# Altium PCB TriF3FCPDB.PcbDoc (part 1 of 2)
Units mm, origin at the board's own origin, x right, y up, seen from the top; angles counter-clockwise.
Board outline 130.11 x 100.1 mm, 2 copper layers (Top Layer, Bottom Layer); 86 components, 62 nets, 310 pads, 526 vias.
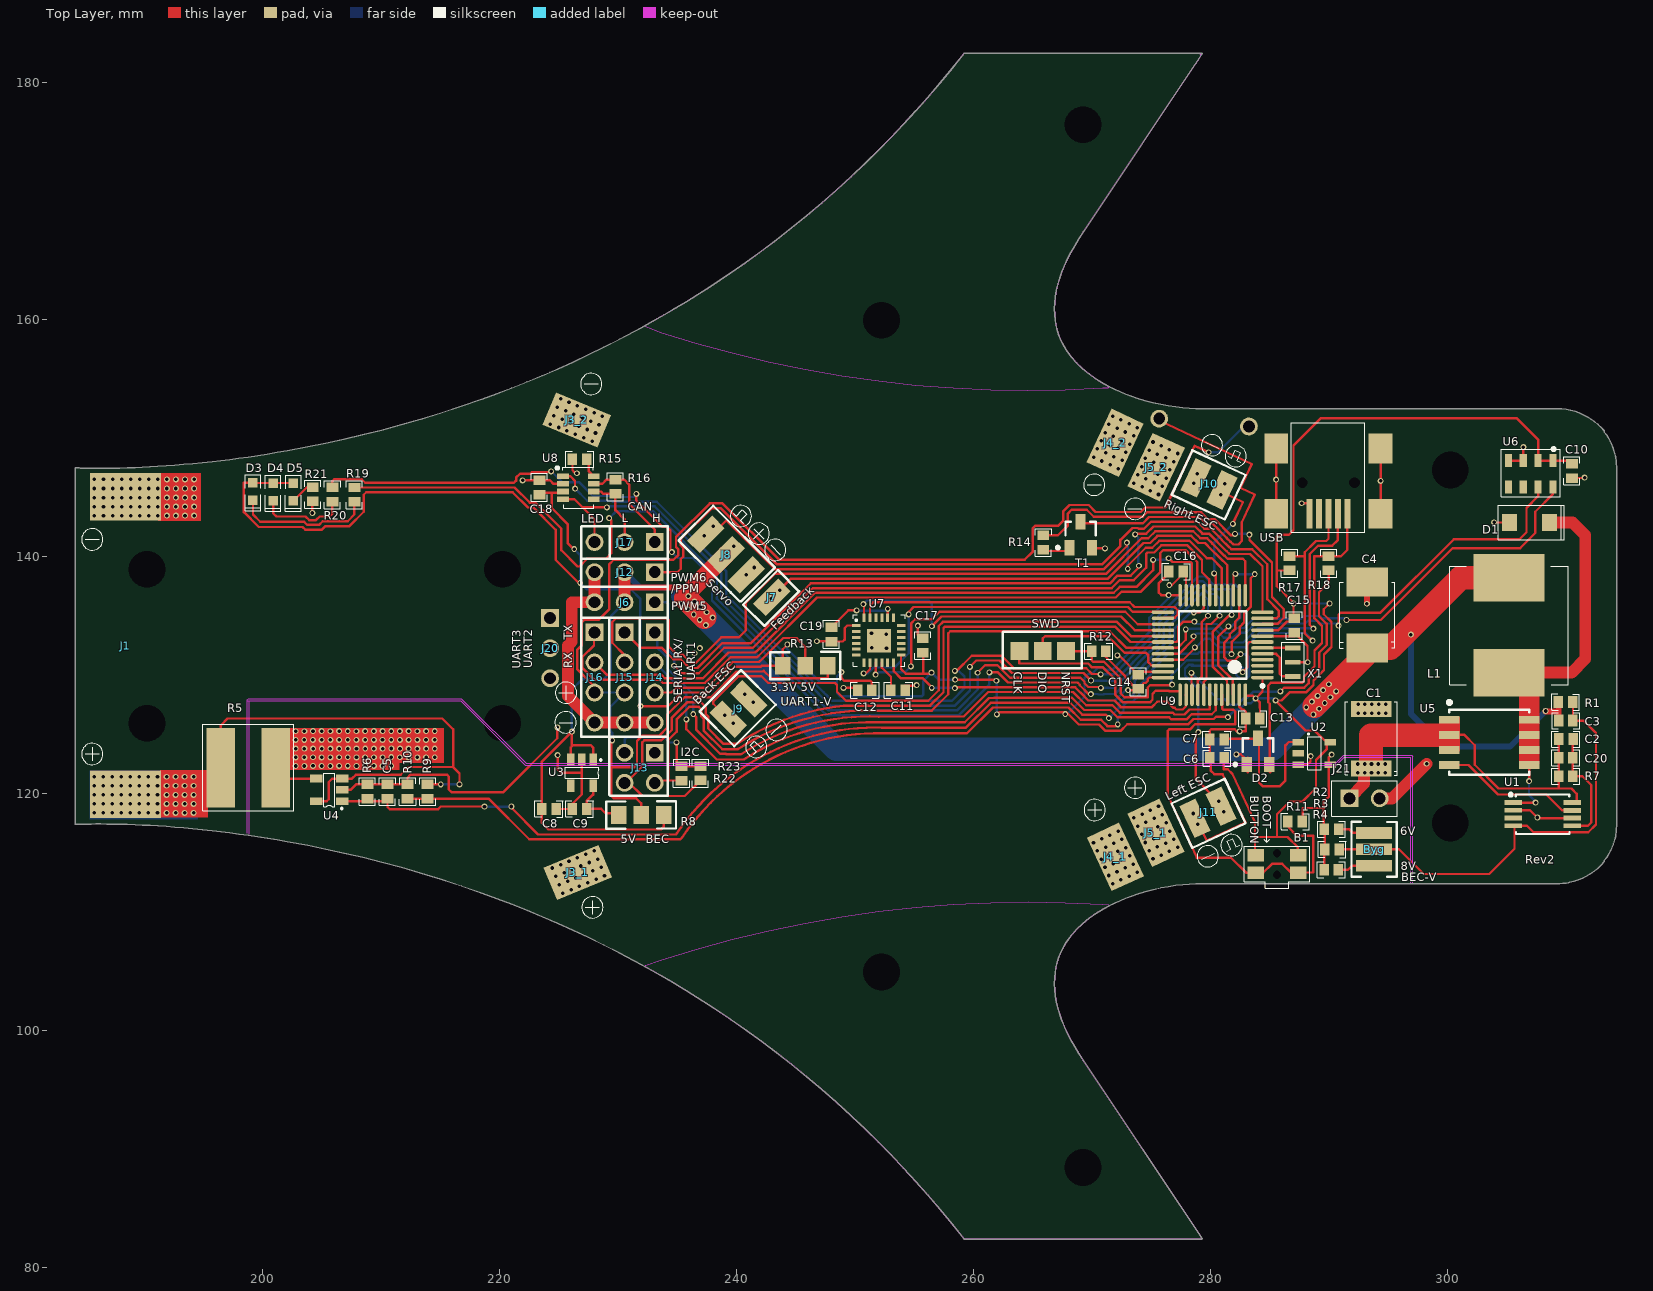
[diagram p0: Top Layer view]
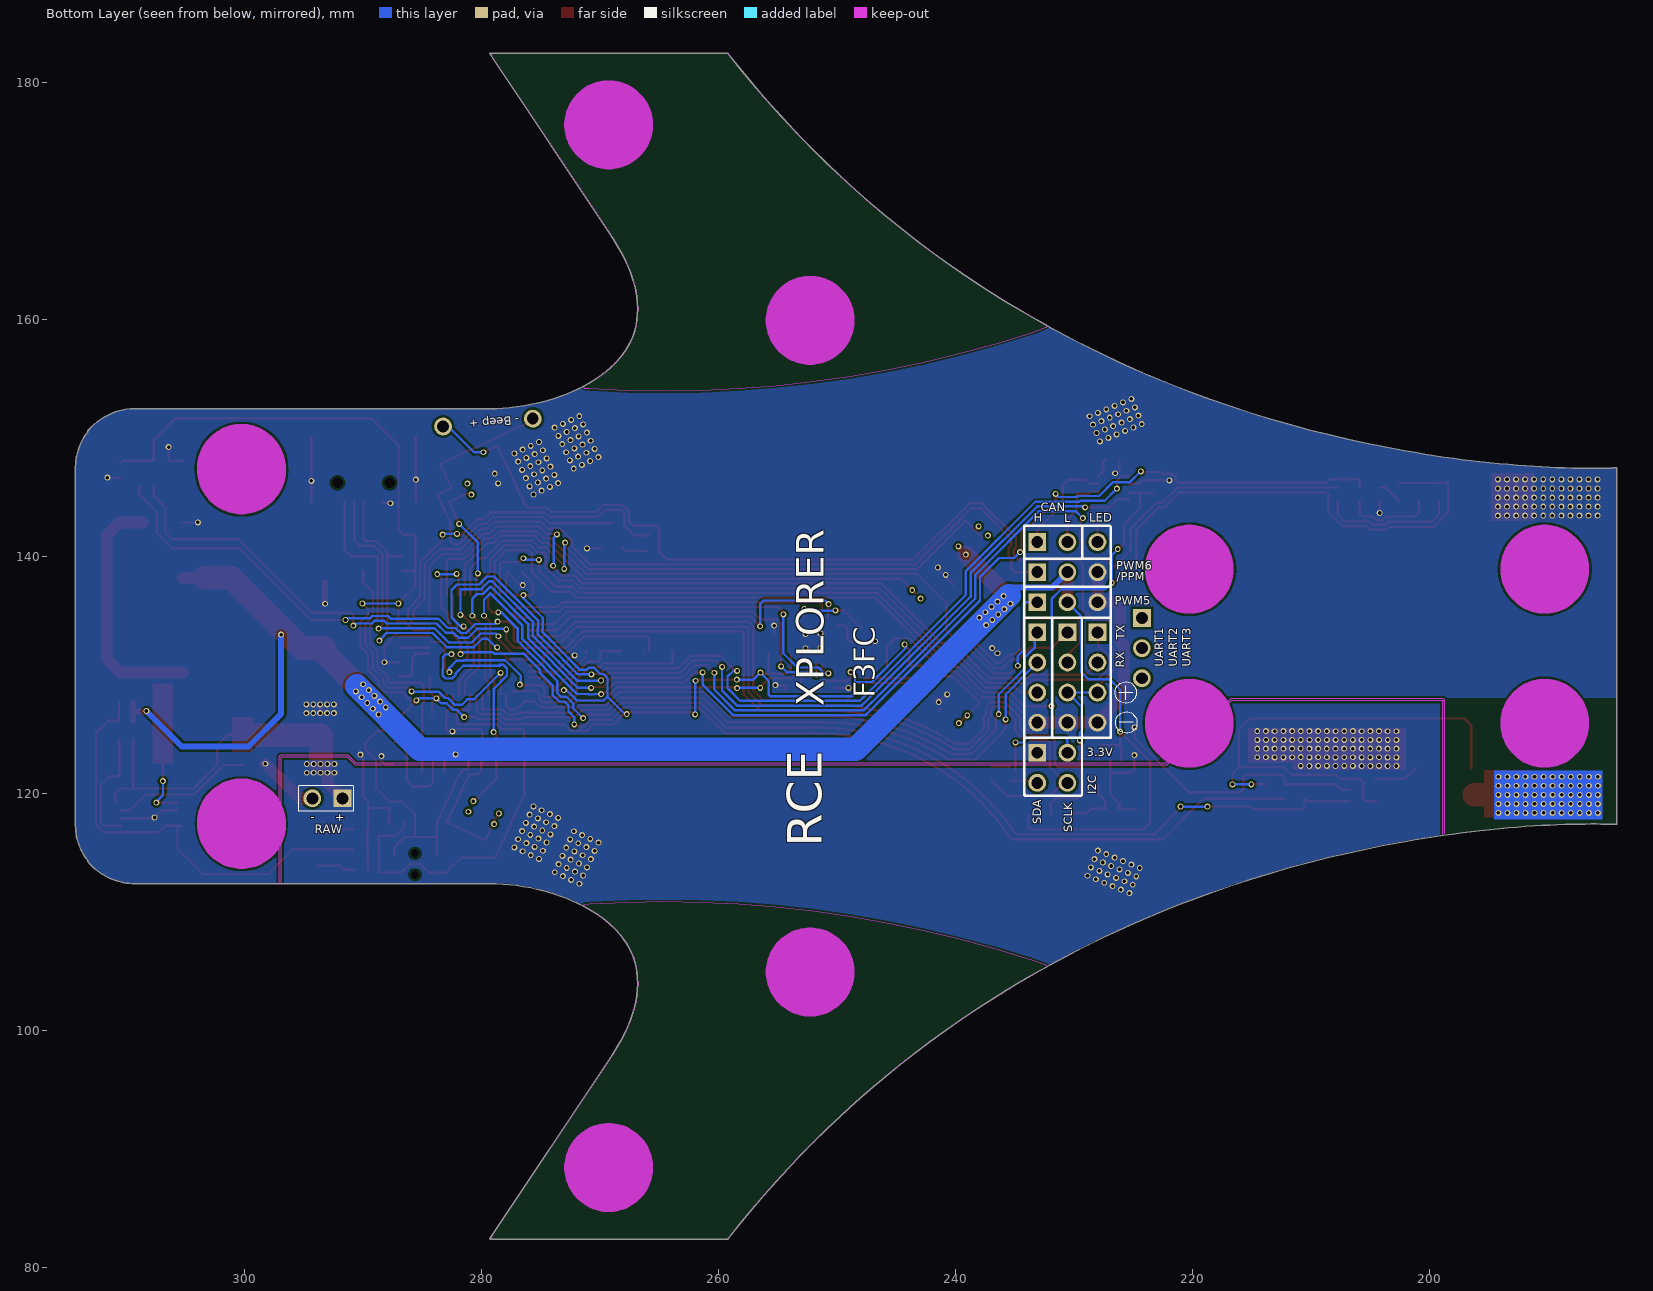
[diagram p1: Bottom Layer view, seen from below]

## Layer stack, top to bottom
Top Layer: signal copper 0.0356
Dielectric: dielectric 0.32, FR-4, Dk 4.8
Bottom Layer: signal copper 0.0356

## Board outline
805 vertices, not listed, extent 184.187,82.388 314.298,182.488

## Design rules (kind name [scope] priority, off if disabled: settings)
Clearance [All] p1: gap=0.2
ComponentClearance [All] p1: gap=0.1 collisioncheckmode=3 verticalgap=0.1 showdistances=FALSE
HoleSize [All] p1: absolutevalues=TRUE maxlimit=6 minlimit=0.025 maxpercent=80.000 minpercent=20.000
MinimumSolderMaskSliver [InNet('VBAT+') vs InNet('VBAT+')] p1: minsoldermaskwidth=0.1
PolygonConnect PolygonConnect_2 [InNet('GND') vs InNet('GND')] p1: connectstyle=Direct reliefconductorwidth=0.254 reliefentries=4 polygonreliefangle="90 Angle" airgapwidth=0.254
PolygonConnect PolygonConnect_1 [InNet('VIN') vs InNet('VIN')] p2: connectstyle=Direct reliefconductorwidth=0.254 reliefentries=4 polygonreliefangle="90 Angle" airgapwidth=0.254
PolygonConnect [All] p3: connectstyle=Relief reliefconductorwidth=0.254 reliefentries=4 polygonreliefangle="90 Angle" airgapwidth=0.254
RoutingVias [All] p1: holewidth=0.3 width=0.5 viastyle="Through Hole" minholewidth=0.3 minwidth=0.5 maxholewidth=55 maxwidth=66
SilkToSilkClearance [All] p1: silktosilkclearance=0.1
SilkToSolderMaskClearance [IsPad] p1: minsilkscreentomaskgap=0.1 clearancetoexposedcopper=TRUE
SolderMaskExpansion [All] p1: expansion=0.102
Width [All] p1: maxlimit=50 minlimit=0.2 preferedwidth=0.2
23 further rules are at their usual default settings.

## Components (designator, comment, footprint, x,y, rotation, side; value= is the part's Value field where it differs from the comment)
"- Beep +" "Buzzer_BP1360-7.6" "Buzzer_BP1360-7.6 - NoRing" 283.248,150.979 r85 bottom (schematic designator Beep)
B1 "Tryckknapp_EVQP7C" Tryckknapp_EVQP7C 283.817,114.778 r0 top
Byg "2POL_LÖDBYGEL" 2pol_lödbygel 293.807,116.678 r270 top
C1 "CAP Tantal" "Cap Tantal 2312" 293.584,122.135 r90 top
C2 "CAP 0603" Cap_0603 310.602,124.592 r180 top
C3 "CAP 0603" Cap_0603 310.596,126.156 r180 top
C4 "CAP Tantal" "Cap Tantal35V" 293.24,132.291 r90 top
C5 "CAP 0603" Cap_0603 210.544,120.773 r270 top
C6 "CAP 0603" Cap_0603 279.955,122.986 r0 top
C7 "CAP 0603" Cap_0603 279.951,124.564 r0 top
C8 "CAP 0603" Cap_0603 224.775,118.698 r180 top
C9 "CAP 0603" Cap_0603 226.155,118.703 r0 top
C10 "CAP 0603" Cap_0603 310.503,146.629 r90 top
C11 "CAP 0603" Cap_0603 254.237,128.714 r180 top
C12 "CAP 0603" Cap_0603 250.232,128.714 r0 top
C13 "CAP 0603" Cap_0603 282.977,126.321 r0 top
C14 "CAP 0603" Cap_0603 273.91,130.032 r270 top
C15 "CAP 0603" Cap_0603 287.079,133.582 r90 top
C16 "CAP 0603" Cap_0603 277.703,138.738 r180 top
C17 "CAP 0603" Cap_0603 255.726,133.098 r270 top
C18 "CAP 0603" Cap_0603 223.365,146.438 r270 top
C19 "CAP 0603" Cap_0603 248.01,134.03 r270 top
C20 "CAP 0603" Cap_0603 310.59,123.028 r180 top
D1 "DIOD_SMD_SX34_Schottky 3A" "SX34 Diode" 308.628,142.875 r180 top
D2 "PMEG3005CT" Sot-23 284.018,123.18 r0 top
D3 "Led_SMD_0603" "Led 0603" 199.195,146.242 r270 top
D4 "Led_SMD_0603" "Led 0603" 200.895,146.208 r270 top
D5 "Led_SMD_0603" "Led 0603" 202.594,146.208 r270 top
J1 "POWERPADS2_21mmPitch" PowerPads6x4.4mm_P29mm 188.427,119.944 r90 top
J3_1 "PowerPad" PowerPad5x3mm#1 226.601,113.341 r292.5 top
J3_2 "PowerPad" PowerPad5x3mm#1 226.524,151.527 r247.5 top
J4_1 "PowerPad" PowerPad5x3mm#2 271.973,114.648 r45 top
J4_2 "PowerPad" PowerPad5x3mm#3 271.955,149.596 r315 top
J5_1 "PowerPad" PowerPad5x3mm#2 275.401,116.695 r45 top
J5_2 "PowerPad" PowerPad5x3mm#3 275.426,147.55 r135 top
J6 "Servo out 6" Header1x3_2.54#1 233.101,136.145 r90 top
J7 "Feedback" Con_1xLödpunkt_3x1.5mm 242.986,136.563 r225 top
J8 "Servo out 4" Con_3xLödpunkt_3x1.5mm 237.416,141.873 r45 top
J9 "Servo out 3" Con_2xLödpunkt_3x1.5mm 239.312,126.29 r135 top
J10 "Servo out 2" Con_2xLödpunkt_3x1.5mm 280.979,145.621 r245 top
J11 "Servo out 1" Con_2xLödpunkt_3x1.5mm 280.893,118.921 r295 top
J12 "Servo out 7" Header1x3_2.54#1 233.101,138.685 r90 top
J13 "Dual Row 2.54" Header2x2_2.54 233.101,123.445 r180 top
J14 "Header4x1_2.54" Header1x4_2.54 233.101,133.605 r180 top
J15 "Header4x1_2.54" Header1x4_2.54 230.561,133.605 r180 top
J16 "Header4x1_2.54" Header1x4_2.54 228.021,133.605 r180 top
J17 "Input" Header1x3_2.54#2 233.101,141.225 r270 top
J20 "Armstöd" Header1x3_2.54#2 224.272,134.81 r0 top
J21 "Header2x1_2.54" Header1x2_2.54 291.745,119.596 r90 top
L1 "Induktans" "Drossel_smd CDRH104R-220 3A 22UH" 305.191,129.203 r90 top
R1 "RES_0603" Res_0603 310.567,127.721 r180 top
R2 "RES_0603" Res_0603 289.62,116.993 r0 top
R3 "RES_0603" Res_0603 289.661,115.285 r0 top
R4 "RES_0603" Res_0603 289.602,113.566 r0 top
R5 "RCurrentsensor" RCurrentsense 196.483,122.192 r0 top
R6 "RES_0603" Res_0603 208.849,120.773 r270 top
R7 "RES_0603" Res_0603 310.594,121.463 r180 top
R8 "RES_0805_Dubbel" Res_0805_dubbel 232.905,118.201 r180 top
R9 "RES_0603" Res_0603 213.933,119.573 r90 top
R10 "RES_0603" Res_0603 212.238,120.773 r270 top
R11 "RES_0603" Res_0603 286.547,117.635 r0 top
R12 "RES_0603" Res_0603 269.981,132.015 r0 top
R13 "RES_0805_Dubbel" Res_0805_dubbel 244.852,130.788 r0 top
R14 "RES_0603" Res_0603 265.894,141.79 r270 top
R15 "RES_0603" Res_0603 226.159,148.217 r0 top
R16 "RES_0603" Res_0603 229.782,145.292 r90 top
R17 "RES_0603" Res_0603 286.68,138.827 r90 top
R18 "RES_0603" Res_0603 289.975,138.827 r90 top
R19 "RES_0603" Res_0603 207.749,145.83 r270 top
R20 "RES_0603" Res_0603 205.901,145.832 r270 top
R21 "RES_0603" Res_0603 204.235,144.652 r90 top
R22 "RES_0603" Res_0603 235.362,121.099 r90 top
R23 "RES_0603" Res_0603 236.958,122.31 r270 top
SWD "3xLödpkt" 3xLödpkt 263.877,132.038 r90 top (schematic designator J19/SWD)
T1 "TRANSISTOR_NPN_2SC2712" SO-G3 269.047,141.854 r0 top
U1 "LM3485" LM3485 305.665,119.238 r0 top
U2 "TPS7B6933-Q1_SOT-23-5" SOT-23-5 287.409,124.349 r0 top
U3 "IC_STAB_5V_MCP1755S" Generic_SOT23-5 227.905,122.851 r270 top
U4 "INA169" SOT23-5 206.721,119.362 r180 top
U5 "AO4407" AO4407 300.164,126.217 r0 top
U6 "MS5611-01ba03" MS5611-01ba03 308.906,148.091 r270 top
U7 "MPU6050" QFN-24_4x4mm 250.765,134.833 r0 top locked
U8 "MAX3051" MAX3051 225.362,146.789 r0 top
U9 "STM32F303CC" LQFP-48 280.195,132.541 r180 top locked
USB "USBmini" "USB mini" 288.361,143.617 r90 top
X1 "Crystal_CSTCE8.000M" Crystal_CSTCE8.000M_ 286.948,132.288 r0 top

## Footprints (in the part's own frame and the unit in brackets; to place one, negate y for a bottom-side part, rotate by r counter-clockwise, add the part's x,y. Pads: shape width x height; smd on the part's side, far side on the other; paste and mask are expansions set on the pad)
2pol_lödbygel [mm]
  rect 1x3 smd: 1(0,0) 2(1.382,0) 3(2.765,0)
  silkscreen extent -0.93,-1.9 3.7,1.93
3xLödpkt [mm]
  rect 1.5x1.5 smd: 1(0,0) 2(-0.001,-1.965) 3(-0.003,-3.93)
  silkscreen extent -1.47,-5.27 1.61,1.42
AO4407 [mm]
  rect 1.75x0.65 smd: 1(0.003,0.003) 2(0.003,-1.267) 3(0.003,-2.537) 4(0.003,-3.807) 5(6.75,-3.81) 6(6.75,-2.54) 7(6.744,-1.273) 8(6.75,0)
  silkscreen extent -0.15,-4.64 6.75,1.63
"Buzzer_BP1360-7.6 - NoRing" [mm]
  round 1.5 hole 1: 1(0,0) 2(0,-7.6)
"Cap Tantal35V" [mm]
  rect 2.45x3.5 smd: 1(0,0) 2(5.55,0)
  silkscreen extent -0.01,-2.32 5.56,2.31
"Cap Tantal 2312" [mm]
  rect 1.35x3.4 smd: 1(0,0) 2(5,0)
  silkscreen extent -0.57,-2.17 5.6,2.22
Cap_0603 [mm]
  rect 0.8x1 smd: 1(0,0) 2(1.2,0)
  silkscreen extent -0.58,-0.68 1.78,0.68
Con_1xLödpunkt_3x1.5mm [mm]
  rect 3x1.5 smd: 1(0,0)
  silkscreen extent -1.98,-1.27 2.16,1.27
Con_2xLödpunkt_3x1.5mm [mm]
  rect 3x1.5 smd: 1(0,0) 2(0,-2.413)
  silkscreen extent -1.98,-3.68 2.16,1.27
Con_3xLödpunkt_3x1.5mm [mm]
  rect 3x1.5 smd: 1(0,0) 2(0,-2.413) 3(0,-4.826)
  silkscreen extent -1.99,-6.1 2.16,1.27
Crystal_CSTCE8.000M_ [mm]
  rect 1.3x0.4 smd: 1(0,0) 2(0,-1.2) 3(0,-2.4)
  silkscreen extent -0.94,-2.86 0.97,0.47
"Drossel_smd CDRH104R-220 3A 22UH" [mm]
  rect 4x6 smd: 1(1,0) 2(9,0)
  silkscreen extent 0,-5 10,5
Generic_SOT23-5 [mm]
  rect 1.06x0.65 smd: 1(0,0) 2(0,-0.95) 3(0,-1.9) 4(2.2,-1.9) 5(2.2,0)
  silkscreen extent 0.02,-2.36 1.54,0.63
Header1x2_2.54 [mm]
  rect 1.5x1.5 hole 1: 1(0,0)
  round 1.5 hole 1: 2(0,-2.54)
  silkscreen extent -1.5,-4.04 1.5,1.5
Header1x3_2.54#1 [mm]
  rect 1.5x1.5 hole 1: 1(0,0)
  round 1.5 hole 1: 2(0,2.54) 3(0,5.08)
Header1x3_2.54#2 [mm]
  rect 1.5x1.5 hole 1: 1(0,0)
  round 1.5 hole 1: 2(0,-2.54) 3(0,-5.08)
Header1x4_2.54 [mm]
  rect 1.5x1.5 hole 1: 1(0,0)
  round 1.5 hole 1: 2(0,2.54) 3(0,5.08) 4(0,7.62)
Header2x2_2.54 [mm]
  rect 1.5x1.5 hole 1: 1(0,0)
  round 1.5 hole 1: 2(2.54,0) 3(0,2.54) 4(2.54,2.54)
"Led 0603" [mm]
  rect 0.8x0.8 smd: 1(0,0) 2(1.5,0)
  silkscreen extent -0.64,-0.66 2.37,0.66
LM3485 [mm] "PFET Buck Controller"
  rect 1.5x0.41 smd: 1(-0.114,0.002) 2(-0.114,-0.65) 3(-0.114,-1.302) 4(-0.114,-1.955) 5(4.881,-1.957) 6(4.881,-1.305) 7(4.881,-0.657) 8(4.881,0.004)
  silkscreen extent -0.42,-2.65 4.64,0.77
LQFP-48 [mm] "TSQFP, 48-Leads, Body 9,0x9,0mm (max), Pitch 0,50mm, IPC Medium Density"
  oval 1.9x0.3 smd: 1(-4.2,2.75) 2(-4.2,2.25) 3(-4.2,1.75) 4(-4.2,1.25) 5(-4.2,0.75) 6(-4.2,0.25) 7(-4.2,-0.25) 8(-4.2,-0.75) 9(-4.2,-1.25) 10(-4.2,-1.75) 11(-4.2,-2.25) 12(-4.2,-2.75) 25(4.2,-2.75) 26(4.2,-2.25) 27(4.2,-1.75) 28(4.2,-1.25) 29(4.2,-0.75) 30(4.2,-0.25) 31(4.2,0.25) 32(4.2,0.75) 33(4.2,1.25) 34(4.2,1.75) 35(4.2,2.25) 36(4.2,2.75)
  oval 0.3x1.9 smd: 13(-2.75,-4.2) 14(-2.25,-4.2) 15(-1.75,-4.2) 16(-1.25,-4.2) 17(-0.75,-4.2) 18(-0.25,-4.2) 19(0.25,-4.2) 20(0.75,-4.2) 21(1.25,-4.2) 22(1.75,-4.2) 23(2.25,-4.2) 24(2.75,-4.2) 37(2.75,4.2) 38(2.25,4.2) 39(1.75,4.2) 40(1.25,4.2) 41(0.75,4.2) 42(0.25,4.2) 43(-0.25,4.2) 44(-0.75,4.2) 45(-1.25,4.2) 46(-1.75,4.2) 47(-2.25,4.2) 48(-2.75,4.2)
  silkscreen extent -4.32,-2.85 2.85,3.57, body extent -4.5,-4.5 4.5,4.5, height 1.5
MAX3051 [mm]
  rect 0.99x0.48 smd mask+0: 1(0,0) 2(0,-0.65) 3(0,-1.3) 4(0,-1.95) 5(2.59,-1.95) 6(2.59,-1.3) 7(2.59,-0.65) 8(2.59,0)
  silkscreen extent -0.58,-2.69 2.61,0.79
MS5611-01ba03 [mm]
  rect 1.1x0.6 smd: 1(0,0) 2(0,-1.25) 3(0,-2.5) 4(0,-3.75) 5(2.2,-3.75) 6(2.2,-2.5) 7(2.2,-1.25) 8(2.2,0)
  silkscreen extent -1.11,-4.38 3.06,0.61
PowerPad5x3mm#1 [mm]
  rect 3x5 smd: 1(0,0)
PowerPad5x3mm#2 [mm]
  rect 5x3 smd rot 70: 1(0,0)
PowerPad5x3mm#3 [mm]
  rect 5x3 smd rot 110: 1(0,0)
PowerPads6x4.4mm_P29mm [mm]
  rect 4x6 smd: 1(0,0) 2(25.1,0)
QFN-24_4x4mm [mm]
  rect 0.7x0.25 smd: 1(-0.65,-0.65) 2(-0.65,-1.15) 3(-0.65,-1.65) 4(-0.65,-2.15) 5(-0.65,-2.65) 6(-0.65,-3.15) 13(3.15,-3.15) 14(3.15,-2.65) 15(3.15,-2.15) 16(3.15,-1.65) 17(3.15,-1.15) 18(3.15,-0.65)
  rect 0.25x0.7 smd: 7(0,-3.8) 8(0.5,-3.8) 9(1,-3.8) 10(1.5,-3.8) 11(2,-3.8) 12(2.5,-3.8) 19(2.5,0) 20(2,0) 21(1.5,0) 22(1,0) 23(0.5,0) 24(0,0)
  silkscreen extent -0.93,-4.08 3.43,0.28
RCurrentsense [mm]
  rect 2.41x6.7 smd: 1(0,0) 2(4.65,0)
  silkscreen extent -1.51,-3.65 6.17,3.67
Res_0603 [mm]
  rect 0.8x1 smd: 1(0,0) 2(1.2,0)
  silkscreen extent -0.58,-0.68 1.78,0.68
Res_0805_dubbel [mm]
  rect 1.3x1.5 smd: 1(-0.945,0.002) 2(0.955,0.002) 3(2.855,0.002)
  silkscreen extent -1.99,-1.15 3.9,1.17
SO-G3 [mm]
  rect 0.85x1.3 smd: 1(-0.95,-1.1) 2(0.95,-1.1) 3(0,1.1)
  silkscreen extent -2.05,-1.22 1.27,1.1
SOT23-5 [mm]
  rect 1.06x0.65 smd: 1(0,0) 2(0,-0.95) 3(0,-1.9) 4(2.2,-1.9) 5(2.2,0)
  silkscreen extent 0.02,-2.36 1.54,0.63
Sot-23 [mm]
  rect 0.85x1.3 smd: 1(-0.95,-0.724) 2(0.95,-0.724) 3(0,1.476)
  silkscreen extent -2.05,-0.85 1.27,1.48
SOT-23-5 [mm]
  rect 1x0.55 smd: 1(0,0) 2(0,-0.95) 3(0,-1.9) 4(2.7,-1.9) 5(2.7,0)
  silkscreen extent 0.81,-2.35 1.94,0.71
"SX34 Diode" [mm]
  rect 1.27x1.47 smd: 1(0,0) 2(3.38,0)
  silkscreen extent -1.23,-1.45 4.33,1.45
Tryckknapp_EVQP7C [mm]
  rect 1.4x1.05 smd: 1(0,0) 2(0,-1.45) 3(3.6,-1.45) 4(3.6,0)
  round 0 hole 0.7 unplated: 5(1.8,-1.625) 6(1.8,0.175)
  silkscreen extent -0.95,-2.78 4.55,0.77
"USB mini" [mm]
  rect 2.5x0.5 smd: 1(0,-3.2) 2(0,-2.4) 3(0,-1.6) 4(0,-0.8) 5(0,0)
  rect 2.5x2 smd: 6(0,2.8) 7(5.5,2.8) 8(0,-6) 9(5.5,-6)
  round 0 hole 0.9 unplated: 10(2.6,0.6) 11(2.6,-3.8)
  silkscreen extent -1.55,-4.65 7.7,1.52

## Part data
J6 J12 J17 J20: library part Header3x1_2.54
J7: library part CON_1xLödpunkt
J8: library part CON_3xLödpunkt
J9 J10 J11: library part CON_2xLödpunkt
J13: library part Header2x2_2.54
U3: "MCP1755S"
U8: library part MAX3051EKA+TCT-ND

## Free pads (board coordinates)
  round 0 hole 3.1 unplated: 1(190.246,125.938) 1(190.246,138.938) 1(220.246,125.938) 1(220.246,138.938) 1(252.245,159.938) 1(252.246,104.938) 1(269.246,88.438) 1(269.246,176.438) 1(300.23,147.317) 1(300.245,117.515)
  rect 2x2 smd paste-0.5: 2(252.022,132.905)

## Via types
v1: diameter 0.5, hole 0.3, Top Layer to Bottom Layer, tented both sides, 526 vias

## Nets (pads, with @x,y where several pads share a name; then routed paths per layer and width w, separated by ;. In a path a pad name is that pad's centre, name@x,y a point inside that pad or via, vN(x,y) a via of type N, cw(c..) or ccw(c..) an arc to the next point about the centre after c; other vN are vias at no path point)
BEC: C3.2 C4.1 C8.2 D2.1 J6.2 J8.2 J12.2 L1.2 R1.2 R8.1 U3.1 U3.3 | length 171.7
  Top Layer w0.2: U3.3@226.005,122.851 226.005,123.892 226.106,123.993 ; v1(226.106,125.224) 226.106,123.993 ; v1@226.115,125.245 223.575,122.706 C8.2@223.575,118.698 223.575,117.536 224.143,116.968 233.633,116.968 233.85,117.184 R8.1@233.85,118.199 ; U3.1@227.905,122.851 227.905,123.888 227.719,124.074 226.187,124.074 226.106,123.993 ; J6.2@230.447,136.145 J6.2@230.561,136.145 ; v1(237.414,134.21) v1@237.414,134.402 ; v1(282.198,123.313) 282.564,123.313 D2.1@282.838,123.039 ; 283.154,121.798 D2.1@283.154,123.037
  Top Layer w0.5: 230.561,137.392 236.302,137.392 ; v1@308.29,126.94 309.396,126.94 ; R1.2@309.367,127.721 309.396,127.692 C3.2@309.396,126.156
  Top Layer w1: J6.2@230.561,136.145 230.561,137.392 J12.2@230.561,138.685 ; C4.1@292.578,131.768 293.159,131.768 C4.1@293.24,131.768 ; C4.1@293.24,132.291 293.24,131.849 C4.1@293.24,131.768 ; C4.1@294.467,131.768 C4.1@293.24,131.768 ; L1.2@303.398,138.203 L1.2@305.191,138.203
  Top Layer w1.5: 235.49,136.534 v1(239.122,140.166)
  Top Layer w2: 235.745,136.453 237.311,134.888 ; 288.783,127.393 293.159,131.768 C4.1@293.24,131.849 ; C4.1@293.24,132.291 295.186,132.291 301.098,138.203 L1.2@303.398,138.203
  Bottom Layer w0.2: v1(226.106,125.224) 226.106,128.757 227.012,129.663 228.805,129.663 229.409,130.267 229.409,134.993 J6.2@230.561,136.145 J6.2@230.561,135.863
  Bottom Layer w0.5: J12.2@230.561,138.685 231.843,137.403 235.117,137.403 ; v1(296.919,133.418) 296.916,133.415 296.916,126.728 299.674,123.97 305.295,123.97 v1(308.29,126.965)
  Bottom Layer w2: 235.482,136.699 248.448,123.733 285.194,123.733 290.537,129.076
  other v1: 288.693,126.671 289.171,127.157 288.085,127.278 289.648,127.644 288.563,127.765 290.126,128.13 289.041,128.251 290.604,128.616 289.519,128.737 289.997,129.223 236.903,134.662 237.988,134.849 236.392,135.114 237.478,135.3 235.882,135.565 236.967,135.752 235.371,136.017 236.456,136.204 235.946,136.656 239.758,140.855
BEEPER/PA0: R14.1 U9.10 | length 30.3
  Top Layer w0.2: R14.1@265.894,141.79 267.121,141.79 267.967,142.636 267.967,143.635 268.281,143.949 269.566,143.949 270.156,143.359 274.278,143.359 274.662,143.743 279.216,143.743 279.812,143.147 280.386,143.147 280.402,143.131 281.705,141.829 ; 281.719,141.806 v1@281.914,141.806 ; v1@283.298,141.957 283.298,141.399 283.675,141.021 283.685,141.021 285.195,139.511 285.195,136.579 286.193,135.581 286.193,134.833 285.701,134.341 284.445,134.341 U9.10@284.395,134.291
  Bottom Layer w0.2: v1(282.077,141.922) 283.234,141.922 v1(283.296,141.86)
BOOT: B1.2 B1.3 R11.1 U9.44 | length 37.7
  Top Layer w0.2: U9.44@280.895,128.291 U9.44@280.945,128.341 280.995,128.291 280.995,127.137 281.062,127.07 281.942,127.07 282.108,126.904 282.108,125.858 278.714,125.858 278.274,125.418 276.533,125.418 276.412,125.297 276.412,119.839 278.86,114.588 281.742,114.588 283.002,113.328 B1.2@283.817,113.328 284.467,113.328 285.202,114.064 286.06,114.064 286.788,113.335 288.694,113.335 288.694,116.43 287.321,116.43 286.547,117.204 R11.1@286.547,117.635
"CAN RX/PB8": J17.3 U8.4 U9.45 | length 86.5
  Top Layer w0.2: U8.4@225.362,144.839 226.334,144.839 227.022,144.151 ; J17.3@228.021,141.225 228.021,143.152 227.022,144.151 ; v1(229.068,144.151) 227.022,144.151 ; v1(259.696,130.692) 260.236,131.232 262.193,131.232 263.254,130.171 269.293,130.171 v1(269.923,129.541) ; U9.45@281.445,128.341 281.395,128.391 281.395,129.519 280.188,130.726 280.188,133.643 281.617,135.072 v1(281.785,135.072)
  Bottom Layer w0.2: v1@229.089,144.13 229.192,144.234 233.109,144.234 238.73,138.613 238.73,136.614 246.955,128.389 246.955,128.383 247.512,127.826 247.518,127.826 247.923,127.421 258.439,127.421 ; 258.534,127.517 258.439,127.421 ; v1@259.711,130.692 259.711,128.694 258.439,127.421 ; v1(269.923,129.541) 269.952,129.512 271.914,129.512 273.499,131.097 273.499,131.129 275.672,133.301 275.672,134.15 275.631,134.192 275.631,134.44 279.11,137.919 279.368,137.919 280.044,137.243 281.785,137.243 v1(281.785,135.072)
"CAN TX/PB9": U8.1 U9.46 | length 85.9
  Top Layer w0.2: U8.1@225.362,146.789 225.972,146.789 226.376,146.386 v1(226.376,145.733) ; v1(258.44,130.352) 258.578,130.352 259.858,131.632 262.358,131.632 263.42,130.571 269.521,130.571 270.001,130.091 270.708,130.091 v1(270.737,130.062) ; v1(281.521,134.102) 280.665,133.246 280.665,130.815 281.895,129.585 281.895,128.391 U9.46@281.945,128.341
  Bottom Layer w0.2: v1(226.376,145.733) 227.4,144.709 229.498,144.709 229.574,144.634 233.275,144.634 239.13,138.779 239.13,136.78 247.355,128.555 247.355,128.548 247.677,128.226 247.684,128.226 248.089,127.821 258.162,127.821 259.243,128.902 259.243,129.875 258.765,130.352 v1(258.44,130.352) ; v1(270.737,130.062) 271.899,130.062 273.099,131.263 273.099,131.294 275.272,133.467 275.272,133.985 275.231,134.026 275.231,134.606 278.944,138.319 279.534,138.319 280.209,137.643 282.088,137.643 282.54,137.191 282.54,134.867 281.775,134.102 v1(281.521,134.102)
CAN_H: J17.1 R16.2 U8.7 | length 9.1
  Top Layer w0.2: U8.7@227.952,146.139 228.669,146.139 229.022,146.492 R16.2@229.782,146.492 230.524,146.492 230.965,146.051 230.965,144.417 233.101,142.281 J17.1@233.101,141.225
CAN_L: J17.2 R16.1 U8.6 | length 6.3
  Top Layer w0.2: U8.6@227.952,145.489 228.562,145.489 228.759,145.292 R16.1@229.782,145.292 229.782,143.918 230.561,143.139 J17.2@230.561,141.225
GND: C1.2 C4.2 C5.1 C6.1 C7.1 C8.1 C9.1 C10.1 C11.1 C12.1 C13.1 C14.1 C15.1 C16.1 C17.1 C18.1 C19.2 D1.2 J1.2 J3_2.1 J4_2.1 J5_2.1 J6.3 J8.3 J9.2 J10.2 J11.2 J12.3 J13.1 J14.4 J15.4 J16.4 J21.2 pad.2 R2.1 R3.1 R4.1 R6.1 R10.1 R11.2 R15.1 R21.1 T1.2 U1.2 U1.6 U2.3 U2.4 U3.2 U4.2 U6.3 U6.4 U7.1 U8.2 U9.8 U9.23 U9.35 U9.47 USB.5 USB.6 USB.7 USB.8 USB.9 X1.2 | length 153.3
  Top Layer w0.2: v1@204.204,143.73 204.204,144.621 R21.1@204.235,144.652 ; U4.2@206.721,120.312 207.437,120.312 207.898,120.773 R6.1@208.849,120.773 R10.1@212.238,120.773 212.238,121.332 212.502,121.595 215.564,121.595 215.725,121.434 215.725,120.35 215.979,120.097 220.309,120.097 224.882,124.67 224.882,125.615 v1@224.9,125.633 ; v1@221.916,146.476 v1(221.954,146.438) C18.1@223.365,146.438 224.263,146.438 224.562,146.139 U8.2@225.362,146.139 ; C8.1@224.775,118.698 226.149,118.698 C9.1@226.155,118.703 ; v1(224.902,123.238) 224.902,122.046 225.181,121.768 226.955,121.768 ; R15.1@226.159,148.217 226.159,147.293 v1@226.343,147.108 ; C9.1@226.398,118.947 C9.1@226.155,118.703 ; U3.2@226.955,122.851 226.955,121.768 ; J8.3@240.186,137.653 240.216,137.653 J8.3@241.301,138.737 ; J9.2@241.018,127.996 J9.2@241.716,127.996 ; J9.2@241.36,127.164 241.23,127.164 J9.2@241.451,126.943 ; v1(246.785,132.852) 247.988,132.852 C19.2@248.01,132.83 248.969,132.83 249.128,132.989 249.128,133.955 249.356,134.183 U7.1@250.115,134.183 ; v1(249.034,128.915) 250.257,128.915 C12.1@250.26,128.918 ; C11.1@254.19,129.112 v1@255.318,129.112 ; C11.1@254.267,128.918 C11.1@254.483,128.702 ; C17.1@255.314,133.404 v1(255.314,134.168) ; T1.2@269.997,140.754 270.053,140.698 v1(271.103,140.698) ; v1@272.218,131.724 C14.1@273.91,130.032 274.169,130.291 U9.35@275.995,130.291 ; v1(276.527,137.586) 276.741,137.586 277.703,138.548 C16.1@277.703,138.738 277.945,138.496 U9.23@277.945,136.741 ; J11.2@278.65,118.234 279.67,116.047 282.932,117.569 281.033,121.642 280.325,121.642 280.014,121.953 C6.1@280.014,123.192 ; J10.2@279.442,147.396 J10.2@279.458,147.379 ; C6.1@279.955,122.986 279.955,124.56 C7.1@279.951,124.564 279.951,125.323 280.061,125.433 282.057,125.433 282.241,125.249 v1(282.463,125.249) 282.971,125.249 282.977,125.255 C13.1@282.977,126.321 ; U9.47@282.445,128.341 282.445,127.302 282.656,127.091 282.812,127.091 282.977,126.926 C13.1@282.977,126.321 ; C13.1@282.843,126.455 C13.1@282.977,126.321 ; C13.1@282.969,126.313 C13.1@282.977,126.321 ; U9.8@284.395,133.291 C15.1@287.058,133.291 ; USB.6@285.561,144.617 USB.7@285.561,150.117 ; X1.2@286.948,131.088 286.956,131.08 v1(288.197,131.08) 288.197,132.464 C15.1@287.079,133.582 ; U2.3@287.442,122.484 288.233,122.484 288.447,122.697 v1@288.447,123.045 ; v1(287.692,144.503) 288.247,144.503 USB.5@288.361,144.617 ; R11.2@287.78,117.43 287.78,118.776 289.551,118.776 289.556,118.772 ; R2.1@289.573,116.952 289.573,118.593 289.556,118.611 289.556,118.772 ; R4.1@289.602,113.566 289.602,115.226 R3.1@289.661,115.285 289.661,116.952 R2.1@289.62,116.993 ; 289.998,120.692 289.998,123.051 v1(290.231,123.283) ; 289.998,122.043 289.998,119.748 289.556,119.305 289.556,118.772 ; C1.2@293.316,127.138 C1.2@293.318,127.136 ; USB.8@294.361,144.617 USB.9@294.361,150.117 ; v1@303.945,142.875 D1.2@305.248,142.875 ; U6.4@305.156,148.091 U6.3@306.406,148.091 306.412,148.097 v1(306.412,149.238) ; U1.2@305.665,118.585 306.977,118.585 307.632,117.93 U1.6@310.462,117.93 ; C10.1@310.503,146.629 311.545,146.629 v1(311.585,146.669) ; C9.1@226.155,118.703 226.155,119.136 226.955,119.936 226.955,121.768 ; R2.1@289.62,116.993 289.62,117.17 289.555,117.105 289.555,117.058 R2.1@289.62,116.993
  Top Layer w0.5: v1(293.208,136.018) 293.208,137.809 C4.2@293.24,137.841 ; C1.2@293.584,127.135 C1.2@293.686,127.237
  Top Layer w1: J12.3@228.021,138.685 J6.3@228.021,136.145 226.095,136.145 226.095,132.807 225.771,132.484 225.771,128.235 J16.4@228.021,125.985 J14.4@233.101,125.985 ; J21.2@294.285,119.596 295.329,119.596 296.173,120.441 ; 296.233,120.493 v1(298.255,122.514)
  other v1: 278.949,117.426 307.602,117.978 278.534,118.317 288.462,123.165 224.882,125.58 292.461,126.79 293.043,126.79 293.625,126.79 294.207,126.79 294.789,126.79 292.461,127.529 293.043,127.529 293.625,127.529 294.207,127.529 294.789,127.529 241.416,127.714 240.711,128.367 255.208,129.151 272.15,131.656 236.46,131.841 252.664,132.246 236.909,132.278 251.405,132.288 252.656,133.456 251.396,133.514 240.828,138.46 241.485,139.076 303.945,142.889 185.817,143.453 186.581,143.453 187.345,143.453 188.109,143.453 188.873,143.453 189.637,143.453 190.401,143.453 191.165,143.453 191.929,143.453 192.693,143.453 193.457,143.453 194.221,143.453 204.205,143.679 185.817,144.217 186.581,144.217 187.345,144.217 188.109,144.217 188.873,144.217 189.637,144.217 190.401,144.217 191.165,144.217 191.929,144.217 192.693,144.217 193.457,144.217 194.221,144.217 185.817,144.981 186.581,144.981 187.345,144.981 188.109,144.981 188.873,144.981 189.637,144.981 190.401,144.981 191.165,144.981 191.929,144.981 192.693,144.981 193.457,144.981 194.221,144.981 275.618,145.238 274.926,145.56 185.817,145.745 186.581,145.745 187.345,145.745 188.109,145.745 188.873,145.745 189.637,145.745 190.401,145.745 191.165,145.745 191.929,145.745 192.693,145.745 193.457,145.745 194.221,145.745 274.233,145.883 275.941,145.93 278.598,146.178 273.541,146.206 275.248,146.253 294.369,146.388 185.817,146.509 186.581,146.509 187.345,146.509 188.109,146.509 188.873,146.509 189.637,146.509 190.401,146.509 191.165,146.509 191.929,146.509 192.693,146.509 193.457,146.509 194.221,146.509 285.545,146.498 274.556,146.576 276.264,146.622 273.864,146.899 275.571,146.945 278.887,147.008 226.533,147.033 274.879,147.268 276.587,147.315 272.222,147.422 274.186,147.591 275.894,147.638 271.529,147.745 275.202,147.961 276.909,148.007 270.837,148.067 272.545,148.114 274.509,148.283 276.217,148.33 270.144,148.39 271.852,148.437 275.525,148.653 277.232,148.7 271.16,148.76 272.868,148.807 274.832,148.976 276.54,149.023 270.467,149.083 272.175,149.129 275.848,149.345 271.483,149.452 273.19,149.499 275.155,149.668 227.813,149.725 270.79,149.775 272.498,149.822 227.107,150.017 271.806,150.145 273.513,150.191 226.401,150.309 228.105,150.431 271.113,150.468 272.821,150.514 225.695,150.602 227.399,150.723 272.128,150.837 273.836,150.884 224.989,150.894 226.693,151.015 228.397,151.136 271.436,151.16 224.283,151.187 273.144,151.207 225.988,151.308 227.692,151.429 272.451,151.53 225.282,151.6 226.986,151.721 228.69,151.842 271.759,151.852 224.576,151.892 226.28,152.014 227.984,152.135 225.574,152.306 227.278,152.427 224.868,152.598 226.572,152.719 225.866,153.012 225.161,153.304
INTERUPT/PA15: U7.12 U9.38 | length 28.3
  Top Layer w0.2: U7.12@253.265,131.033 253.276,131.022 253.276,130.333 253.891,129.718 255.742,129.718 v1@256.506,128.954 ; v1(258.44,128.894) 258.517,128.971 268.584,128.971 269.368,128.187 269.368,128.171 269.69,127.849 271.892,127.849 272.448,127.292 275.057,127.292 275.51,127.746 ; 275.526,127.767 276.353,127.767 276.893,127.227 276.987,127.227 277.123,127.091 277.671,127.091 277.945,127.365 U9.38@277.945,128.341 U9.38@277.895,128.291
  Bottom Layer w0.2: v1(256.478,128.926) v1@258.44,128.926
ISENSOR/PB2: C5.2 R6.2 U4.1 U9.20 | length 86.8
  Top Layer w0.2: U4.1@206.721,119.362 210.333,119.362 C5.2@210.544,119.573 210.544,118.876 210.739,118.681 214.818,118.681 215.039,118.902 218.731,118.902 v1(218.737,118.896) ; v1(221.006,118.909) 221.006,118.799 223.263,116.542 234.893,116.542 cw(c251.819,105.21) 252.535,125.567 cw(c251.819,105.21) 252.634,125.563 ; 252.237,125.567 259.376,125.567 261.474,127.665 ; 262.148,127.665 261.474,127.665 ; v1(271.43,126.361) 271.43,126.398 271.179,126.649 269.193,126.649 268.177,127.665 261.474,127.665 ; v1(278.596,135.292) 279.1,135.292 279.445,135.637 U9.20@279.445,136.741 U9.20@279.395,136.791
  Bottom Layer w0.2: v1(218.737,118.896) 220.994,118.896 v1(221.006,118.909) ; v1(271.43,126.361) 272.267,127.197 272.267,127.601 272.838,128.173 273.286,128.173 273.608,128.495 273.608,129.508 274.699,130.6 274.699,130.631 276.957,132.889 276.957,133.936 278.313,135.292 v1(278.596,135.292)
LEDB/PB4: R20.1 U9.40 | length 102.7
  Top Layer w0.2: R20.1@205.901,145.832 205.901,146.373 206.047,146.519 207.114,146.519 207.125,146.53 208.373,146.53 208.673,146.23 221.219,146.23 221.404,146.415 221.404,146.666 221.726,146.988 222.591,146.988 222.741,147.138 v1@224.498,147.138 ; v1(231.549,145.285) 231.549,144.737 233.785,142.501 234.127,142.501 234.436,142.192 234.436,140.484 v1(234.548,140.373) ; v1(261.342,130.223) 262.07,130.223 ; 262.082,130.212 262.07,130.223 ; v1(269.918,128.399) 269.722,128.399 268.973,129.148 268.973,129.177 268.779,129.371 262.923,129.371 262.07,130.223 ; U9.40@278.895,128.391 U9.40@278.945,128.341 278.945,129.548 ; U9.40@278.945,129.105 278.945,129.548 ; v1(279.797,135.008) 279.266,134.477 279.266,129.869 278.945,129.548
  Bottom Layer w0.2: v1(224.365,147.195) 225.276,146.283 226.703,146.283 227.877,145.109 229.664,145.109 229.739,145.034 231.298,145.034 v1(231.549,145.285) ; v1(234.548,140.373) 235.038,139.883 236.329,139.883 237.93,138.281 237.93,136.283 246.155,128.058 246.155,128.051 247.18,127.026 247.187,127.026 247.592,126.621 258.77,126.621 261.342,129.194 v1(261.342,130.223) ; v1(269.918,128.399) 269.923,128.404 270.489,128.404 270.528,128.365 270.984,128.365 271.023,128.404 271.938,128.404 274.299,130.766 274.299,130.797 276.557,133.055 276.557,134.19 279.261,136.895 279.797,136.359 v1(279.797,135.008)
LEDO/PB5: R19.1 U9.41 | length 105.9
  Top Layer w0.2: R19.1@207.749,145.83 221.273,145.83 222.565,144.538 223.028,144.538 225.205,142.361 225.205,140.55 226.595,139.16 226.747,139.16 227.408,139.821 228.966,139.821 229.438,140.293 229.438,143.061 v1(229.251,143.248) ; v1(260.353,130.198) 260.987,130.832 262.027,130.832 263.088,129.771 269.036,129.771 269.373,129.434 269.373,129.313 269.695,128.991 270.68,128.991 v1(270.756,128.915) ; U9.41@279.395,128.391 U9.41@279.445,128.341 279.445,129.427 279.666,129.647 279.666,134.311 280.078,134.311 v1(280.775,135.008)
  Bottom Layer w0.2: v1@229.269,143.23 229.872,143.834 232.943,143.834 238.33,138.447 238.33,136.449 246.555,128.223 246.555,128.217 247.346,127.426 247.353,127.426 247.757,127.021 258.604,127.021 260.379,128.796 v1@260.379,130.198 ; v1(270.756,128.915) 271.883,128.915 273.899,130.931 273.899,130.963 276.072,133.135 276.072,134.316 279.234,137.478 279.244,137.478 279.881,136.84 280.395,136.84 280.775,136.46 v1(280.775,135.008)
NetBeep_2: "- Beep +.2" T1.3 | length 31.4
  Top Layer w0.2: T1.3@269.047,142.954 269.184,142.817 274.302,142.817 274.828,143.343 279.05,143.343 279.646,142.747 280.212,142.747 281.364,141.595 281.364,141.578 281.686,141.256 281.703,141.256 281.938,141.021 282.358,141.021 282.648,141.31 282.648,142.892 ; 275.671,151.472 283.493,147.814 282.552,145.795 283.745,145.239 282.624,142.837
NetByg_1: Byg.1 R2.2 | length 3.1
  Top Layer w0.2: R2.2@290.82,116.993 291.709,116.993 292.024,116.678 Byg.1@293.807,116.678
NetByg_2: Byg.2 C3.1 R1.1 R3.2 U1.4 | length 37.9
  Top Layer w0.2: R3.2@290.861,115.285 Byg.2@293.677,115.285 ; Byg.2@293.677,115.296 295.912,115.296 298.002,113.206 ; 298.007,113.211 303.531,113.211 305.665,115.344 305.665,117.195 U1.4@305.58,117.28 ; U1.4@305.297,117.28 U1.4@305.58,117.28 ; R1.1@310.567,127.721 310.596,127.692 C3.1@310.596,126.156 311.489,126.156 312.547,125.098 312.547,117.393 311.889,116.735 307.262,116.735 306.717,117.28 U1.4@305.58,117.28
NetByg_3: Byg.3 R4.2 | length 3.1
  Top Layer w0.2: R4.2@290.802,113.566 291.601,113.566 291.949,113.913 Byg.3@293.807,113.913
NetC2_1: C2.1 C20.1 R7.1 U1.5 | length 10.3
  Top Layer w0.2: U1.5@310.462,117.277 311.313,117.277 ; C2.1@310.602,124.592 310.594,124.583 R7.1@310.594,121.463 311.4,121.463 312.147,120.716 312.147,117.558 311.87,117.281 U1.5@310.917,117.281
NetC7_2: C7.2 D2.3 U2.1 | length 12.3
  Top Layer w0.2: C7.2@281.532,124.633 283.996,124.633 D2.3@284.018,124.656 ; 284.104,123.998 284.104,121.573 284.104,120.929 284.425,120.608 285.838,120.608 286.327,121.096 286.327,124.065 286.61,124.349 U2.1@287.409,124.349
NetC9_2: C9.2 R8.3 U3.5 | length 5.1
  Top Layer w0.2: U3.5@227.905,120.651 227.905,119.911 227.355,119.361 C9.2@227.355,118.703 228.589,118.703 228.96,118.332 229.917,118.332 R8.3@230.05,118.199
NetC11_2: C11.2 U7.10 | length 2.6
  Top Layer w0.2: U7.10@252.265,131.033 252.265,130.628 253.037,129.856 C11.2@253.037,128.714
NetC19_1: C19.1 U7.20 | length 6.2
  Top Layer w0.2: C19.1@247.948,134.092 C19.1@248.01,134.03 249.439,135.459 v1(250.144,135.459) ; U7.20@252.765,134.833 252.765,135.386 v1@252.885,135.505
  Bottom Layer w0.2: v1(250.144,135.459) 250.162,135.441 252.626,135.441 v1(252.765,135.581)
NetD1_1: D1.1 L1.1 U1.1 U5.5 U5.6 U5.7 U5.8 | length 26.3
  Top Layer w0.2: U1.1@305.665,119.238 v1@307.446,119.238 ; U5.5@306.914,122.646 306.921,122.639 v1@306.921,121.043
  Top Layer w1: L1.1@305.191,130.203 310.481,130.203 311.639,131.36 311.639,141.809 310.573,142.875 D1.1@308.628,142.875
  Bottom Layer w0.2: v1@306.921,121.043 306.89,121.011 306.89,119.886 307.446,119.33 v1(307.446,119.242)
  other v1: 306.9,121.043
NetD3_2: D3.2 R19.2 | length 11.6
  Top Layer w0.2: D3.2@199.195,144.742 199.195,143.547 199.803,142.939 203.512,142.939 203.775,142.676 204.776,142.676 205.088,142.988 207.188,142.988 207.749,143.549 R19.2@207.749,144.63
NetD4_2: D4.2 R20.2 | length 7.5
  Top Layer w0.2: D4.2@200.895,144.708 200.895,143.663 201.17,143.388 203.629,143.388 203.94,143.076 204.514,143.076 204.826,143.388 205.678,143.388 205.901,143.611 R20.2@205.901,144.632
NetD5_2: D5.2 R21.2 | length 2.1
  Top Layer w0.2: D5.2@202.594,144.708 202.614,144.708 203.758,145.852 R21.2@204.235,145.852
NetJ14_3: J14.3 R13.2 | length 16.5
  Top Layer w0.2: J14.3@233.101,128.525 234.507,128.525 234.916,128.934 237.497,128.934 239.663,131.1 241.892,131.1 241.982,131.19 242.011,131.19 243.952,133.131 245.065,133.131 245.807,132.389 R13.2@245.807,130.79
NetR14_2: R14.2 T1.1 | length 2.1
  Top Layer w0.2: R14.2@266.095,140.469 267.812,140.469 T1.1@268.097,140.754
NetR15_2: R15.2 U8.8 | length 1.7
  Top Layer w0.2: R15.2@227.359,148.217 227.523,148.053 227.523,147.218 U8.8@227.952,146.789
NetU1_7: U1.7 U5.4 | length 11.9
  Top Layer w0.2: U5.4@300.167,122.41 301.772,122.41 304.263,119.919 304.268,119.924 308.343,119.924 309.688,118.578 U1.7@310.461,118.578
NRST: R12.1 SWD.3 U9.7 | length 24.1
  Top Layer w0.2: SWD.3@268.263,132.012 268.265,132.015 R12.1@269.981,132.015 269.981,131.242 270.103,131.12 270.977,131.12 ; 271,131.143 272.429,129.714 272.429,128.443 272.746,128.126 274.71,128.126 274.71,128.942 274.909,129.141 v1@276.764,129.141 ; v1(282.718,130.255) 283.117,130.654 283.117,132.63 283.278,132.791 U9.7@284.395,132.791
  Bottom Layer w0.2: v1@276.695,129.157 276.695,129.953 277.997,131.256 281.506,131.256 281.551,131.211 282.11,131.211 282.718,130.603 v1(282.718,130.255)
  other v1: 276.764,129.189
OSC_IN: U9.5 X1.3 | length 4.2
  Top Layer w0.2: U9.5@284.395,131.791 285.541,131.791 285.85,131.482 285.85,130.099 286.061,129.888 X1.3@286.948,129.888
OSC_OUT: U9.6 X1.1 | length 2.6
  Top Layer w0.2: U9.6@284.395,132.291 286.945,132.291 X1.1@286.948,132.288
PPM/PWM6/PA1: J12.1 U9.11 | length 67.1
  Top Layer w0.2: J12.1@233.101,138.685 235.016,138.685 ; 235.004,138.669 235.302,138.967 235.302,139.784 235.498,139.979 235.498,140.766 235.302,140.962 235.302,141.469 237.926,144.093 238.66,144.093 243.412,139.341 270.85,139.341 272.406,140.897 272.406,141.411 273.412,142.417 273.868,142.417 273.942,142.342 274.393,142.342 274.994,142.943 278.885,142.943 279.481,142.347 280.047,142.347 280.964,141.43 280.964,141.413 281.521,140.856 281.538,140.856 281.772,140.621 283.52,140.621 284.795,139.346 284.795,136.413 285.754,135.454 285.754,134.96 285.585,134.791 U9.11@284.395,134.791
PWM1/PA7: J8.1 U9.17 | length 53.2
  Top Layer w0.2: J8.1@237.72,141.58 237.72,141.619 239.144,143.043 243.246,138.941 271.017,138.941 272.941,140.865 272.941,141.168 v1(272.956,141.183) ; v1(273.022,138.958) 273.022,139.228 274.536,140.742 275.089,140.742 275.69,141.343 278.222,141.343 279.695,139.87 280.114,139.87 280.945,139.039 U9.17@280.945,136.741
  Bottom Layer w0.2: v1(272.956,141.183) 273.022,141.117 v1(273.022,138.958)
  other v1: 237.278,141.764 238.057,142.543
PWM2/PB0: J10.1 U9.18 | length 10.7
  Top Layer w0.2: U9.18@280.395,136.791 U9.18@280.445,136.741 v1@280.445,138.586 ; J10.1@281.036,145.4 282.739,144.606 281.883,142.77 v1@281.881,142.766 ; J10.1@281.405,145.735 J10.1@281.423,145.753
  Bottom Layer w0.2: v1(280.316,138.586) 280.316,141.183 v1(281.897,142.764)
  other v1: 280.857,145.234 281.193,146.157
PWM3/PA8: J9.1 U9.29 | length 49.2
  Top Layer w0.2: J9.1@239.84,125.776 238.04,127.576 238.04,127.78 240.16,129.9 242.117,129.9 242.688,129.329 248.319,129.329 248.484,129.164 248.484,128.59 249.244,127.83 256.186,127.83 257.074,128.718 257.074,134.144 257.421,134.491 272.11,134.491 273.31,133.291 U9.29@275.995,133.291
  other v1: 239.716,125.942 239.011,126.595
PWM4/PA4: J11.1 U9.14 | length 29.2
  Top Layer w0.2: v1@278.981,125.211 v1(278.981,125.183) 278.773,124.976 278.773,121.221 280.655,119.338 J11.1@280.765,119.102 ; U9.14@282.445,136.741 282.433,136.729 282.433,134.848 282.085,134.5 282.085,133.888 281.638,133.441 281.638,133.2 281.18,132.742 281.18,131.477 281.446,131.211 282.007,131.211 282.542,131.746 v1(282.542,131.761)
  Bottom Layer w0.2: v1(278.981,125.183) 278.981,128.832 277.85,129.963 277.85,130.543 278.163,130.856 278.376,130.856 ; v1(282.542,131.761) 283.033,131.761 283.26,131.533 283.26,130.498 283.268,130.491 283.268,129.923 283.05,129.705 282.49,129.705 282.168,130.027 282.168,130.177 281.552,130.792 278.577,130.792 ; 278.376,130.856 278.439,130.792 278.577,130.792 ; 278.376,130.856 278.513,130.856 278.577,130.792
  other v1: 281.111,118.467 280.696,119.358
PWM5/PB1: J6.1 U9.19 | length 60.3
  Top Layer w0.2: v1(234.745,130.785) 235.384,130.147 236.82,130.147 238.973,132.3 241.395,132.3 246.436,137.341 271.68,137.341 272.335,137.996 273.515,137.996 274.575,139.056 274.575,140.216 274.702,140.342 275.255,140.342 275.855,140.943 278.056,140.943 279.295,139.704 279.295,138.672 279.895,138.072 279.895,136.791 U9.19@279.945,136.741
  Bottom Layer w0.2: J6.1@233.101,136.145 234.112,136.145 234.229,136.028 234.229,132.114 234.745,131.597 v1(234.745,130.785)
RSSI/FEEDBACK/PA6: J7.1 U9.16 | length 43.6
  Top Layer w0.2: J7.1@243.36,136.886 244.615,138.141 271.348,138.141 274.35,141.142 274.923,141.142 275.524,141.743 278.388,141.743 278.988,141.142 279.554,141.142 279.764,140.932 279.764,140.915 281.023,139.656 281.04,139.656 281.419,139.277 281.419,136.767 U9.16@281.445,136.741
  other v1: 242.95,136.452 243.651,137.166